# EAGLE board PowerboardRev4 (EAGLE 8.6.0)
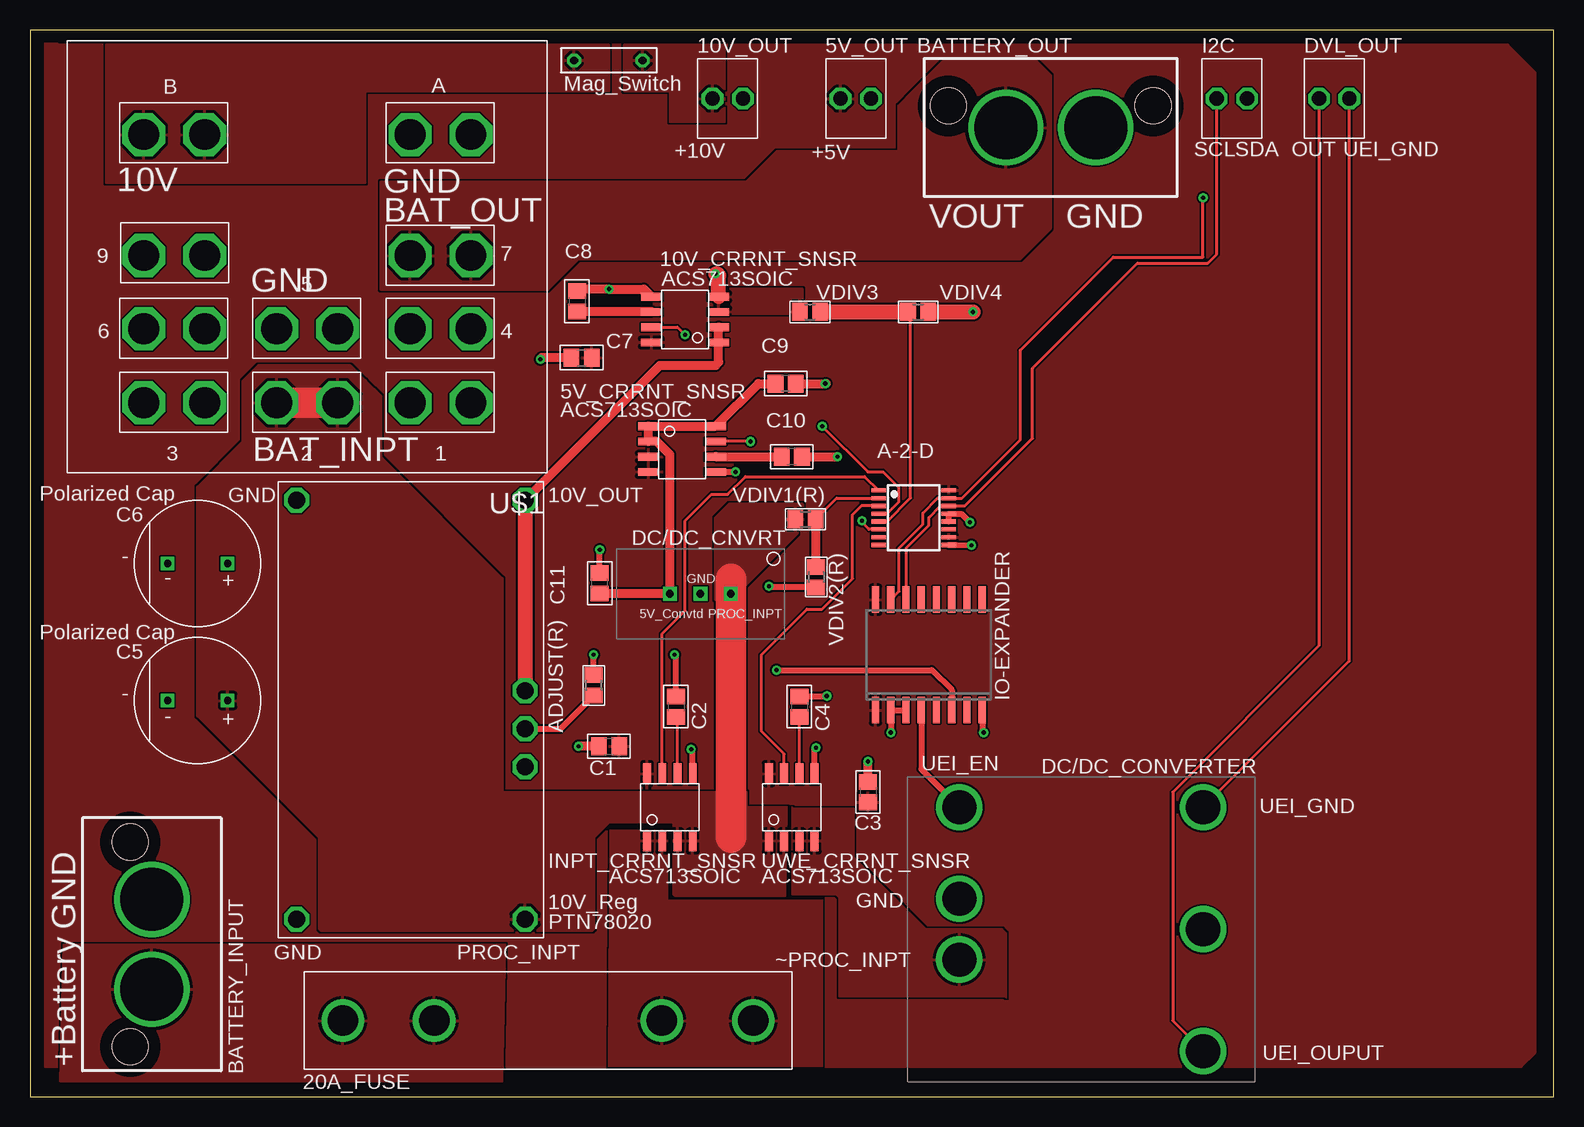
[diagram p0: board, top side]
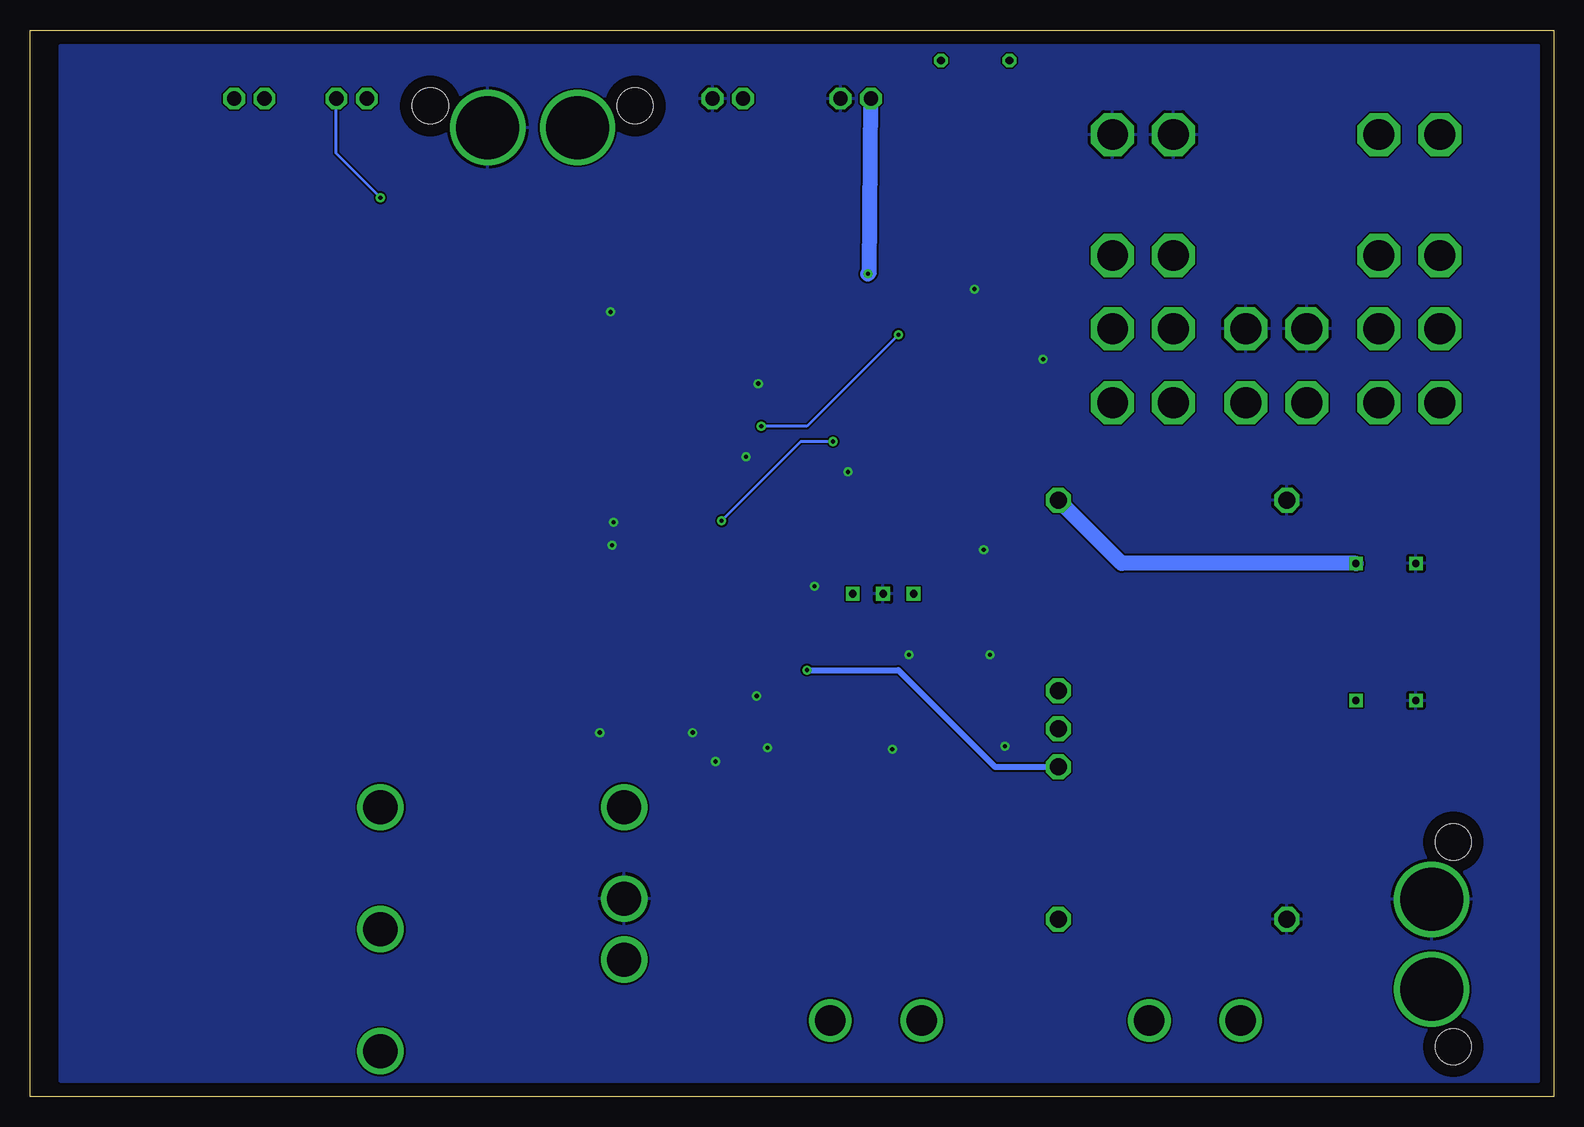
[diagram p1: board, bottom side, seen from below]

Size 127 x 88.9 mm. Coordinates in mm from the lower left corner, seen from the top.
Outline: 0,0 127,0 127,88.9 0,88.9 0,0
Copper layers (1*16): Top 0.035mm / dielectric 1.5mm / Bottom 0.035mm
Design rules "default": minimum track width 6mil, minimum drill 0.35mm, track to track 6mil, track to pad 6mil, pad to pad 6mil, via to via 6mil, smd to smd 6mil, copper to edge 40mil, drill to drill 6mil, minimum pad ring 10mil, minimum via ring 8mil, stop-mask expansion 4mil, vias tented up to drill 0mil, thermal gap 10mil

## Footprints (pad centres in the part's own frame; a part is rotated, then mirrored left to right if it is on the bottom)
ACS713-SOIC = smd 0.65 x 1.75: P$1 -1.905,-2.8; P$2 -0.635,-2.8; P$3 0.635,-2.8; P$4 1.905,-2.8; P$5 1.905,2.8; P$6 0.635,2.8; P$7 -0.635,2.8; P$8 -1.905,2.8
KK254_VERT_2PIN = drill 1.2 octagon: P$1 1.27,0; P$2 -1.27,0
PTN = drill 1.397 octagon: ADJUST -1.587,-9.525; GND1 -17.462,9.525; GND2 17.462,9.525; INHIBIT -4.763,-9.525; SENSE 1.587,-9.525; VIN -17.462,-9.525; VOUT 17.462,-9.525
1.25"_FUSECLIPS = drill 2.54: P$1 -17.107,0; P$2 -9.487,0; P$3 9.487,0; P$4 17.107,0
TSSOP16 = smd 0.35 x 1.2: 1 -2.275,-2.925; 2 -1.625,-2.925; 3 -0.975,-2.925; 4 -0.325,-2.925; 5 0.325,-2.925; 6 0.975,-2.925; 7 1.625,-2.925; 8 2.275,-2.925; 9 2.275,2.925; 10 1.625,2.925; 11 0.975,2.925; 12 0.325,2.925; 13 -0.325,2.925; 14 -0.975,2.925; 15 -1.625,2.925; 16 -2.275,2.925
R0805 = smd 1.3 x 1.5: 1 -0.85,0; 2 0.85,0
SUPERSABRE_2CIRCUIT = drill 5.25: P$1 -3.747,0; P$2 3.747,0 | hole 2.997: -8.534,-1.803; 8.534,-1.803
C0805 = smd 1.3 x 1.5: 1 -0.85,0; 2 0.85,0
PANASONIC_A_TYPE_M = drill 0.6 square: + 2.5,0; - -2.5,0
TSR2 = drill 0.65 square: 1 -2.54,0; 2 0,0; 3 2.54,0
UEI15 = drill 2.845: +VIN 10.16,2.54; +VOUT -10.16,10.16; -VIN 10.16,-2.54; -VOUT -10.16,-10.16; ON/OFFCNTRL 10.16,-10.16; OTPTTRIM -10.16,0
SO16W = smd 0.6 x 2.2: 1 -4.445,-4.6; 2 -3.175,-4.6; 3 -1.905,-4.6; 4 -0.635,-4.6; 5 0.635,-4.6; 6 1.905,-4.6; 7 3.175,-4.6; 8 4.445,-4.6; 9 4.445,4.6; 10 3.175,4.6; 11 1.905,4.6; 12 0.635,4.6; 13 -0.635,4.6; 14 -1.905,4.6; 15 -3.175,4.6; 16 -4.445,4.6
HE151TR-ND = drill 0.65 octagon: P$1 -2.81,0; P$2 2.905,0
KUHP_6.35MM-QUICK-CONNECT = drill 2.57 octagon: 1A -13.64,6.17; 1B -8.56,6.17; 2A -2.54,6.17; 2B 2.54,6.17; 3A 8.56,6.17; 3B 13.64,6.17; 4A -13.64,0; 4B -8.56,0; 5A -2.54,0; 5B 2.54,0; 6A 8.56,0; 6B 13.64,0; 7A -13.64,-6.1; 7B -8.56,-6.1; 9A 8.56,-6.1; 9B 13.64,-6.1; AA -13.64,-16.18; AB -8.56,-16.18; BA 8.56,-16.18; BB 13.64,-16.18

## Placement (x,y rotation side)
5V_CRRNT_SNSR  ACS713SOIC  [ACS713-SOIC]  54.36,53.98 270 top
5V_OUT  KK254_VERT_2PIN""  [KK254_VERT_2PIN]  68.83,83.19 0 top
10V_CRRNT_SNSR  ACS713SOIC  [ACS713-SOIC]  54.61,64.77 90 top
10V_OUT  KK254_VERT_2PIN""  [KK254_VERT_2PIN]  58.17,83.19 0 top
10V_REGULATOR  PTN78020  [PTN]  31.75,32.26 90 top
20A_FUSE  [1.25"_FUSECLIPS]  43.18,6.35 0 top
A-2-D  ADS7828  [TSSOP16]  73.66,48.26 270 top
ADJUST(R)  2.66k  [R0805]  46.99,34.29 90 top
BATTERY_INPUT  2_SUPERSABRE  [SUPERSABRE_2CIRCUIT]  10.16,12.7 270 top
BATTERY_OUT  2_SUPERSABRE  [SUPERSABRE_2CIRCUIT]  85.09,80.77 180 top
C1  0.1u  [C0805]  48.26,29.21 0 top
C2  47n  [C0805]  53.85,32.51 270 top
C3  0.1u  [C0805]  69.85,25.4 270 top
C4  47n  [C0805]  64.14,32.51 270 top
C5  [PANASONIC_A_TYPE_M]  13.97,33.02 0 top
C6  [PANASONIC_A_TYPE_M]  13.97,44.45 0 top
C7  0.1u  [C0805]  45.97,61.59 0 top
C8  47n  [C0805]  45.59,66.29 270 top
C9  0.1u  [C0805]  62.99,59.44 180 top
C10  47n  [C0805]  63.5,53.34 180 top
C11  FILTER  [C0805]  47.5,42.8 90 top
DC/DC_CNVRT  TSR2-2450  [TSR2]  55.88,41.91 180 top
DC/DC_CONVERTER  UEI15  [UEI15]  87.63,13.97 180 top
DVL_OUT  KK254_VERT_2PIN""  [KK254_VERT_2PIN]  108.71,83.19 0 top
I2C  KK254_VERT_2PIN""  [KK254_VERT_2PIN]  100.2,83.19 0 top
INPT_CRRNT_SNSR  ACS713SOIC  [ACS713-SOIC]  53.34,24.13 0 top
IO-EXPANDER  PCF8574T  [SO16W]  74.93,36.83 0 top
MAGREAD  HE151TR-ND  [HE151TR-ND]  48.26,86.36 180 top
U$1  KUHP-5XX1-XX  [KUHP_6.35MM-QUICK-CONNECT]  23.11,64.01 180 top
UWE_CRRNT_SNSR  ACS713SOIC  [ACS713-SOIC]  63.5,24.13 0 top
VDIV1(R)  90kO  [R0805]  64.64,48.13 0 top
VDIV2(R)  10kO  [R0805]  65.53,43.31 270 top
VDIV3  90kO  [R0805]  65.02,65.41 0 top
VDIV4  10kO  [R0805]  74.04,65.41 0 top

## Library data of the parts
5V_CRRNT_SNSR 10V_CRRNT_SNSR INPT_CRRNT_SNSR UWE_CRRNT_SNSR = allegro
5V_OUT 10V_OUT BATTERY_INPUT BATTERY_OUT DVL_OUT I2C = molex
10V_REGULATOR A-2-D = texas
20A_FUSE = littelfuse
ADJUST(R) C1-C11 VDIV1(R) VDIV2(R) VDIV3 VDIV4 = resistor
DC/DC_CNVRT = tracoPower
DC/DC_CONVERTER = murata
IO-EXPANDER = texas; MPN: PCF8574T/3,512; OC_FARNELL: 1201255; OC_NEWARK: 70R6870
MAGREAD = magReed
U$1 = TE

## Nets
5V: 5V_CRRNT_SNSR.P$3 5V_CRRNT_SNSR.P$4 5V_OUT.P$2 10V_CRRNT_SNSR.P$8 A-2-D.10 A-2-D.16 C1.2 C3.2 C7.2 INPT_CRRNT_SNSR.P$8 IO-EXPANDER.1 IO-EXPANDER.16 UWE_CRRNT_SNSR.P$8
5V_CNVTD: 5V_CRRNT_SNSR.P$1 5V_CRRNT_SNSR.P$2 5V_CRRNT_SNSR.P$8 C9.2 C11.1 DC/DC_CNVRT.3
5V_CURRENT: 5V_CRRNT_SNSR.P$7 A-2-D.6
5V_FILT: 5V_CRRNT_SNSR.P$6 C10.2
10V_CURRENT: 10V_CRRNT_SNSR.P$7 A-2-D.4
10V_EN: 10V_REGULATOR.INHIBIT IO-EXPANDER.6
10V_OUT: 10V_CRRNT_SNSR.P$1 10V_CRRNT_SNSR.P$2 10V_REGULATOR.SENSE 10V_REGULATOR.VOUT C6.+
10V_VOLTAGE: A-2-D.5 VDIV3.2 VDIV4.1
+VIN: DC/DC_CONVERTER.+VIN UWE_CRRNT_SNSR.P$3 UWE_CRRNT_SNSR.P$4
BATTERY_LINE: BATTERY_OUT.P$2 U$1.7A U$1.7B
FILTER: C4.2 UWE_CRRNT_SNSR.P$6
FLTR_10V: 10V_CRRNT_SNSR.P$6 C8.2
GND: 5V_CRRNT_SNSR.P$5 5V_OUT.P$1 10V_CRRNT_SNSR.P$5 10V_OUT.P$1 10V_REGULATOR.GND1 10V_REGULATOR.GND2 A-2-D.9 A-2-D.12 A-2-D.13 ADJUST(R).2 BATTERY_INPUT.P$1 BATTERY_OUT.P$1 C1.1 C2.1 C3.1 C4.1 C5.- C6.- C7.1 C8.1 C9.1 C10.1 C11.2 DC/DC_CNVRT.2 DC/DC_CONVERTER.-VIN INPT_CRRNT_SNSR.P$5 IO-EXPANDER.2 IO-EXPANDER.3 IO-EXPANDER.8 U$1.5A U$1.5B U$1.AA U$1.AB UWE_CRRNT_SNSR.P$5 VDIV2(R).2 VDIV4.2
INPT_FILT: C2.2 INPT_CRRNT_SNSR.P$6
INPUT_CURRENT: A-2-D.1 INPT_CRRNT_SNSR.P$7
INPUT_VOLTAGE: A-2-D.2 VDIV1(R).2 VDIV2(R).1
N$5: 10V_REGULATOR.ADJUST ADJUST(R).1
PROC_INPUT: 10V_REGULATOR.VIN C5.+ DC/DC_CNVRT.1 INPT_CRRNT_SNSR.P$3 INPT_CRRNT_SNSR.P$4 U$1.2A U$1.2B UWE_CRRNT_SNSR.P$1 UWE_CRRNT_SNSR.P$2 VDIV1(R).1
PROCESSED_10V_OUT: 10V_CRRNT_SNSR.P$3 10V_CRRNT_SNSR.P$4 10V_OUT.P$2 MAGREAD.P$1 VDIV3.1
PROCESSED_UEI_OUTPUT: DC/DC_CONVERTER.+VOUT DVL_OUT.P$2
RLY_10V: MAGREAD.P$2 U$1.BA U$1.BB
SCL: A-2-D.14 I2C.P$2 IO-EXPANDER.14
SDA: A-2-D.15 I2C.P$1 IO-EXPANDER.15
UEI_EN: DC/DC_CONVERTER.ON/OFFCNTRL IO-EXPANDER.4
UEI_GND: DC/DC_CONVERTER.-VOUT DVL_OUT.P$1
UWE_CURRENT: A-2-D.3 UWE_CRRNT_SNSR.P$7
VBAT: 20A_FUSE.P$1 20A_FUSE.P$2 BATTERY_INPUT.P$2
VBAT_P: 20A_FUSE.P$3 20A_FUSE.P$4 INPT_CRRNT_SNSR.P$1 INPT_CRRNT_SNSR.P$2

## Tracks (layer width: path | path; a pad name or v marks a point on that pad's centre or on a via)
5V
  pour Top (rank 2): 1.27,88.27 1.27,2.54 124.33,2.54 125.48,3.68 125.48,85.34 123.19,87.63 2.41,87.63 2.16,87.88 1.65,87.88
5V_CNVTD
  Top 0.762: C11.1 53.3,41.95 DC/DC_CNVRT.3 53.34,53.51 52.24,54.61 5V_CRRNT_SNSR.P$2 5V_CRRNT_SNSR.P$1 5V_CRRNT_SNSR.P$8 60.71,59.44 C9.2
5V_CURRENT  (via drill 0.35)
  Top 0.254: A-2-D.6 69.94,47.28 69.34,47.88 v69.34,48.01 | v60.07,54.61 5V_CRRNT_SNSR.P$7
  Bottom 0.254: v69.34,48.01 62.74,54.61 v60.07,54.61 59.94,54.61
5V_FILT
  Top 0.762: 5V_CRRNT_SNSR.P$6 C10.2
10V_CURRENT  (via drill 0.35)
  Top 0.254: 10V_CRRNT_SNSR.P$7 53.98,64.14 v54.61,63.5 | v66.04,55.88 69.85,52.07 71.12,52.07 72.39,50.8 72.39,49.53 71.44,48.59 A-2-D.4
  Bottom 0.254: v54.61,63.5 62.23,55.88 v66.04,55.88
10V_EN  (via drill 0.35)
  Top 0.508: v62.23,35.56 75.18,35.56 76.83,33.91 IO-EXPANDER.6
  Bottom 0.508: v62.23,35.56 54.61,35.56 46.55,27.5 10V_REGULATOR.INHIBIT
10V_OUT
  Top 0.762: 10V_REGULATOR.VOUT 52.51,60.96 57.15,60.96 57.41,61.22 10V_CRRNT_SNSR.P$1 10V_CRRNT_SNSR.P$2
  Top 1.27: 10V_REGULATOR.VOUT 10V_REGULATOR.SENSE
  Bottom 1.27: C6.+ 36.01,44.45 10V_REGULATOR.VOUT
10V_VOLTAGE
  Top 0.254: A-2-D.5 71.43,47.94 73.41,49.91 73.41,65.19 VDIV4.1
  Top 1.27: VDIV3.2 69.85,65.41 VDIV4.1
+VIN
  pour Top: 63.5,24.13 63.5,16.89 67.18,16.89 67.44,16.64 67.44,8.38 81.28,8.38 81.41,8.26 81.41,13.59 81.03,13.97 74.68,13.97 68.71,19.94 68.71,24 63.63,24
BATTERY_LINE
  Bottom 0.254: BATTERY_OUT.P$2 81.34,78.68
  pour Top: 29.21,76.2 29.21,67.31 43.18,67.31 45.72,69.85 82.55,69.85 85.09,72.39 85.09,85.09 83.82,86.36 76.2,86.36 73.66,83.82 72.39,82.55 72.39,78.74 62.23,78.74 59.69,76.2
FILTER
  Top 0.254: UWE_CRRNT_SNSR.P$6 C4.2
FLTR_10V
  Top 0.254: 51.77,65.44 10V_CRRNT_SNSR.P$6
  Top 0.762: C8.2 51.77,65.44
GND  (via drill 0.35)
  Top 0.508: ADJUST(R).2 v46.99,36.83 | v53.72,36.83 53.85,36.7 C2.1 | C11.2 v47.5,45.59 | VDIV2(R).2 61.63,42.46 61.59,42.42 v61.59,42.55 | INPT_CRRNT_SNSR.P$5 55.24,28.96 v55.12,28.96 | UWE_CRRNT_SNSR.P$5 65.41,29.08 v65.53,29.08 | IO-EXPANDER.3 IO-EXPANDER.2 v71.75,30.35 | C4.1 66.13,33.36 66.17,33.4 v66.42,33.4 | IO-EXPANDER.8 79.38,30.48 v79.5,30.35 | 5V_CRRNT_SNSR.P$5 v58.8,52.07 | v78.36,47.88 77.65,48.59 A-2-D.13 A-2-D.12 | A-2-D.9 77.2,45.98 v78.49,45.97
  Top 0.762: C9.1 v66.29,59.44 66.38,59.44 | C10.1 v67.31,53.34 | C8.1 45.43,67.31 v48.26,67.31 51.17,67.31 10V_CRRNT_SNSR.P$5 | C7.1 42.67,61.59 v42.55,61.47 | C1.1 v45.72,29.21 | C3.1 v69.85,27.94
  Top 1.27: VDIV4.2 v78.61,65.41
  pour Bottom: 1.27,87.63 1.27,1.27 124.46,1.27 124.46,87.63
INPT_FILT
  Top 0.254: INPT_CRRNT_SNSR.P$6 53.98,31.54 C2.2
INPUT_CURRENT
  Top 0.254: INPT_CRRNT_SNSR.P$7 52.7,38.61 54.61,40.51 54.61,48.01 56.8,50.2 58.15,50.2 59.64,51.69 69.58,51.69 A-2-D.1
INPUT_VOLTAGE
  Top 0.254: VDIV1(R).2 67.25,49.88 A-2-D.2
  Top 0.762: VDIV1(R).2 65.49,44.2 VDIV2(R).1
N$5
  Top 0.508: 10V_REGULATOR.ADJUST 44.22,30.67 ADJUST(R).1
PROC_INPUT
  Top 2.54: 58.42,21.59 DC/DC_CNVRT.1 58.42,43.18 | U$1.2B U$1.2A
  pour Top: 53.59,24 53.59,16.89 53.72,16.76 62.99,16.76 63.12,23.75 63.12,24.13 53.72,24.13
  pour Top: 43.56,13.84 24.26,13.84 24.13,13.97 24.13,21.59 13.97,31.75 13.97,50.8 17.78,54.61 17.78,59.69 19.05,60.96 26.67,60.96 27.94,59.69 29.21,58.42 29.21,53.34 39.37,43.18 39.37,25.4 59.69,25.4 59.69,22.86 48.26,22.86 46.99,21.59 46.99,13.97 46.86,13.84
  pour Top: 57.15,41.91 57.15,48.26 58.29,49.4 64.39,49.4 64.39,47.37 59.56,42.55 59.56,41.4 57.15,41.4
PROCESSED_10V_OUT  (via drill 0.35)
  Top 1.27: 10V_CRRNT_SNSR.P$4 57.41,68.45 57.28,68.58 v57.15,68.58
  Bottom 1.27: v57.15,68.58 57.02,68.71 10V_OUT.P$2
  pour Top: 57.15,67.31 57.15,65.41 57.28,65.28 64.26,65.28 64.39,65.41 64.39,67.31
  pour Top: 49.53,87.63 49.53,83.82 53.34,83.82 53.34,81.28 57.91,81.28 57.91,87.38 58.17,87.63 49.53,87.63
PROCESSED_UEI_OUTPUT
  Top 0.254: DVL_OUT.P$2 107.44,37.59 95.25,25.4 95.25,6.35 DC/DC_CONVERTER.+VOUT
RLY_10V
  pour Top: 6.35,87.63 6.35,76.2 26.67,76.2 27.94,76.2 27.94,78.74 27.94,83.82 48.26,83.82 48.26,87.63
SCL
  Top 0.254: IO-EXPANDER.14 73.03,45.72 74.93,47.62 74.93,48.26 75.91,49.23 A-2-D.14 77.94,49.23 83.57,54.86 83.57,60.71 92.33,69.47 98.17,69.47 98.93,70.23 I2C.P$2
SDA  (via drill 0.35)
  Top 0.254: IO-EXPANDER.15 72.45,42.12 72.45,45.72 74.42,47.69 74.42,48.64 75.67,49.88 A-2-D.15 77.7,49.88 82.55,54.74 82.55,62.23 90.3,69.98 97.79,69.98 v97.79,74.93
  Bottom 0.254: v97.79,74.93 101.47,78.61 I2C.P$1
UEI_EN
  Top 0.508: IO-EXPANDER.4 74.3,27.3 DC/DC_CONVERTER.ON/OFFCNTRL
UEI_GND
  Top 0.254: DC/DC_CONVERTER.-VOUT 109.98,36.32 DVL_OUT.P$1
UWE_CURRENT
  Top 0.254: UWE_CRRNT_SNSR.P$7 62.87,28.57 60.96,30.48 60.96,36.83 64.77,40.64 66.04,40.64 68.58,43.18 68.58,48.51 69.34,49.28 70.69,49.28 A-2-D.3
VBAT
  pour Top: 2.79,12.7 39.62,12.7 39.37,1.27 2.54,1.27
VBAT_P
  pour Top: 48.39,22.23 53.09,22.23 53.09,16.38 66.04,16.38 66.04,2.54 48.26,2.54

## Text on the board
tPlace: Mag_Switch | +10V | +5V | SCL | SDA | OUT | UEI_GND | 10V | GND | BAT_OUT | VOUT | GND | GND | BAT_INPT | Polarized Cap | GND | 10V_OUT | - | GND | + | 5V_Convtd | PROC_INPT | Polarized Cap | - | + | UEI_EN | UEI_GND | 10V_Reg | GND | GND | PTN78020 | GND | PROC_INPT | ~PROC_INPT | +Battery | UEI_OUPUT